# Altium PCB Copy of MB1180.PcbDoc
Units mm, origin at the board's own origin, x right, y up, seen from the top; angles counter-clockwise.
Board outline 90.32 x 30.2 mm, 4 copper layers (Top Layer, GND, PWR, Bottom Layer); 78 components, 56 nets, 240 pads, 83 vias.
Unrouted connection lines stored in the file: 1.
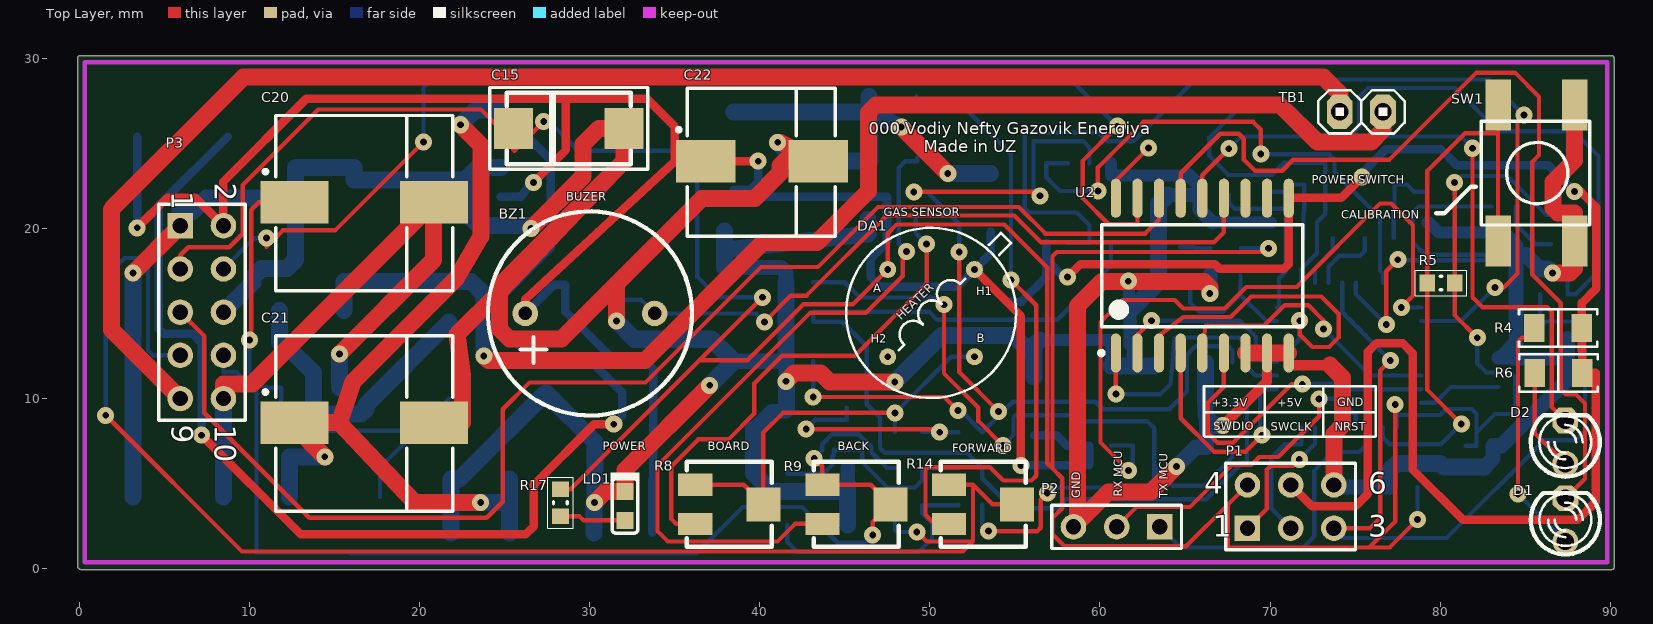
[diagram p0: Top Layer view]
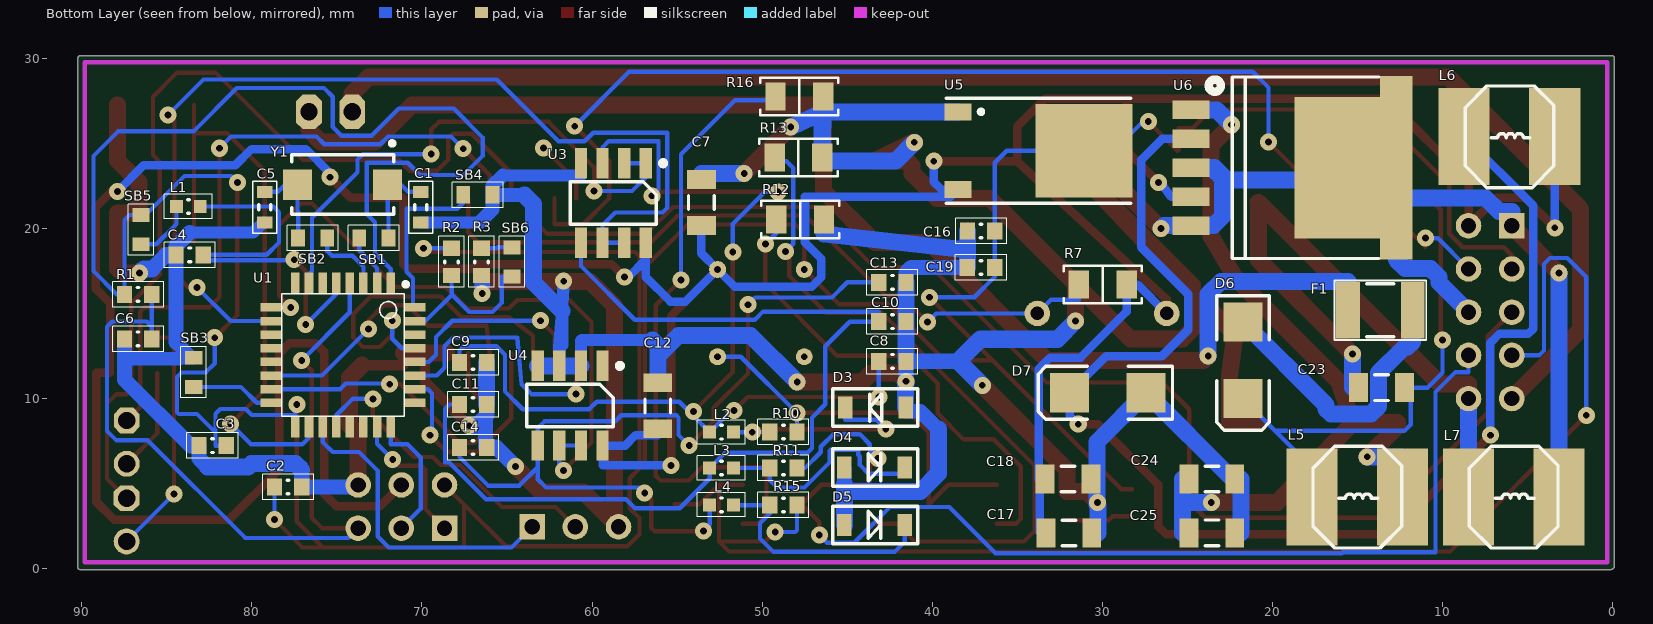
[diagram p1: Bottom Layer view, seen from below]

## Layer stack, top to bottom
Top Solder: solder mask 0.0102, Solder Resist, Dk 3.5
Top Layer: signal copper 0.0356
Dielectric1: core 0.32, FR-4, Dk 4.8
GND: signal copper 0.0356
Dielectric2: prepreg 0.32, FR-4, Dk 4.8
PWR: signal copper 0.0356
Dielectric3: core 0.32, FR-4, Dk 4.8
Bottom Layer: signal copper 0.0356
Bottom Solder: solder mask 0.0102, Solder Resist, Dk 3.5

## Board outline
-0.085,0.12 ccw(c0.042,0.12) 0,0 ccw(c0.103,0.074) 0.103,-0.053 90.103,-0.053 ccw(c90.103,0.074) 90.231,0.074 ccw(c90.103,0.074) 90.213,0.14 90.213,30.021 ccw(c90.085,30.021) 90.085,30.148 0.042,30.148 ccw(c0.042,30.021) -0.085,30.021

## Design rules (kind name [scope] priority, off if disabled: settings)
Clearance Clearance_ALL [All] p1: gap=0.254
DiffPairsRouting [All] p1: maxlimit=0.254 minlimit=0.152 mostfreqgap=0.254 toplayer_prefgap=0.203 toplayer_minwidth=0.381 toplayer_maxwidth=0.381 toplayer_prefwidth=0.381 midlayer1_mingap=0.254 midlayer1_minwidth=0.381 midlayer1_maxwidth=0.381 midlayer1_prefwidth=0.381 midlayer2_mingap=0.254 midlayer2_minwidth=0.381 midlayer2_maxwidth=0.381 midlayer2_prefwidth=0.381 bottomlayer_prefgap=0.203 bottomlayer_minwidth=0.381 bottomlayer_maxwidth=0.381 bottomlayer_prefwidth=0.381 maxuncoupledlength=12.7
FabricationTestPointUsage TestPointUsage [All] p1: valid=0 allowmultiple=FALSE
FabricationTestpoint Testpoint [(IsPad And (OnTopLayer Or OnBottomLayer))] p1: side=3 testpointundercomponent=TRUE minsize=1.016 maxsize=2.54 preferedsize=1.524 minholesize=0 maxholesize=1.016 preferedholesize=0.813 testpointgrid=0.025 allowsidetop=TRUE allowsidebottom=TRUE usegrid=TRUE gridtolerance=0
HoleSize [All] p1: absolutevalues=TRUE maxlimit=3 minlimit=0.025 maxpercent=80.000 minpercent=20.000
MinimumSolderMaskSliver [All] p1: minsoldermaskwidth=0
PolygonConnect PolygonConnect_1 [IsVia] p1: connectstyle=Direct reliefconductorwidth=0.508 reliefentries=4 polygonreliefangle="90 Angle" airgapwidth=0.254
PolygonConnect [All] p2: connectstyle=Relief reliefconductorwidth=0.254 reliefentries=4 polygonreliefangle="90 Angle" airgapwidth=0.254
RoutingLayers [All] p1: top layer_v5=TRUE mid layer 1_v5=FALSE mid layer 2_v5=FALSE bottom layer_v5=TRUE
RoutingVias [All] p1: holewidth=0.4 width=1 viastyle="Through Hole" minholewidth=0.203 minwidth=0.406 maxholewidth=0.711 maxwidth=2
SMDEntry [All] p1: side=TRUE corner=TRUE anyangle=FALSE
SMDNeckDown [All] p1: percent=100.000
SMDToCorner [All] p1: distance=393701
SMDToPlane [All] p1: distance=393701
SilkToSilkClearance [All] p1: silktosilkclearance=0.102
SilkToSolderMaskClearance SilkscreenOverComponentPads [IsPad] p1: minsilkscreentomaskgap=0.102 clearancetoexposedcopper=TRUE
SolderMaskExpansion [All] p1: expansion=0.102
Width "Schematic Width Constraint_9" [InNet('5V')] p1: maxlimit=1 minlimit=0.45 preferedwidth=0.5
Width "Schematic Width Constraint_8" [InNet('NetD7_2')] p2: maxlimit=1 minlimit=0.45 preferedwidth=0.5
Width "Schematic Width Constraint_7" [InNet('NetD6_1')] p3: maxlimit=1.1 minlimit=0.95 preferedwidth=1
Width "Schematic Width Constraint_5" [InNet('NetC21_1')] p4: maxlimit=1.1 minlimit=0.95 preferedwidth=1
Width "Schematic Width Constraint_4" [InNet('NetC20_2')] p5: maxlimit=1.1 minlimit=0.95 preferedwidth=1
Width "Schematic Width Constraint_3" [InNet('NetP3_9')] p6: maxlimit=1.1 minlimit=0.95 preferedwidth=1
Width "Schematic Width Constraint_2" [InNet('GND')] p7: maxlimit=1.1 minlimit=0.95 preferedwidth=1
Width "Schematic Width Constraint_1" [InNet('GND')] p8: maxlimit=1.1 minlimit=0.95 preferedwidth=1
Width "Schematic Width Constraint" [InNet('5V')] p9: maxlimit=1.1 minlimit=0.95 preferedwidth=1
Width "Schematic Width Constraint_6" [InNet('NetF1_1')] p10: maxlimit=1.1 minlimit=0.95 preferedwidth=1
Width Width_ALL [All] p11: maxlimit=0.3 minlimit=0.254 preferedwidth=0.254
22 further rules are at their usual default settings.

## Classes and differential pairs
component class MCU_32_1: C7 C8 C9 C10 C11 C12 C13 C14 C15 C16 C17 C18 C19 C20 C21 C22 C23 C24 C25 D3 D4 D5 D6 D7 DA1 F1 L2 L3 L4 L5 L6 L7 LD1 R8 R9 R10 R11 R12 R13 R14 R15 R16 R17 TB1 U3 U4 U5 U6
component class "Copy of MCU_32": BZ1 C1 C2 C3 C4 C5 C6 D1 D2 L1 P1 P2 P3 R1 R2 R3 R4 R5 R6 R7 SB1 SB2 SB3 SB4 SB5 SB6 SW1 U1 U2 Y1

## Components (designator, comment, footprint, x,y, rotation, side; value= is the part's Value field where it differs from the comment)
BZ1 "HCM-1203A" HCM-1203A 30.025,15 r90 top
C1 "22pF 6v" CAP0603 70.065,21.243 r270 bottom
C2 "100nF 6v" 0603C 77.866,4.795 r180 bottom
C3 "100nF 6v" 0603C 82.306,7.225 r0 bottom
C4 "100nF 6v" 0603C 83.648,18.446 r0 bottom
C5 "22pF 6v" CAP0603 79.235,21.243 r270 bottom
C6 "100nF 6v" 0603C 86.681,13.507 r180 bottom
C7 "1uF 16V" C1206 53.577,21.518 r90 bottom
C8 "1uF 16v" 0603C 42.344,12.186 r180 bottom
C9 "100nF 16v" 0603C 66.995,12.123 r180 bottom
C10 "1uF 16v" 0603C 42.344,14.512 r180 bottom
C11 "100nF 16v" 0603C 66.995,9.646 r180 bottom
C12 "1uF 16V" C1206 56.136,9.57 r90 bottom
C13 "1uF 16v" 0603C 42.344,16.83 r180 bottom
C14 "100nF 16v" 0603C 66.995,7.127 r180 bottom
C15 "220uF 10v" "SMD D" 26.224,25.876 r0 top
C16 "100nF 6v" 0603C 37.13,19.842 r180 bottom
C17 "0.1uF 16v" C1206 31.974,2.103 r180 bottom
C18 "1uF 16V" C1206 32.025,5.263 r180 bottom
C19 "1uF 6v" 0603C 37.137,17.695 r0 bottom
C20 "470uF 25v" C_EL_10 16.749,21.432 r0 top
C21 "470uF 25v" C_EL_10 16.749,8.478 r0 top
C22 "470uF 16v" C_EL_8 40.142,23.896 r0 top
C23 "0.1uF 25V" C1206 13.602,10.634 r0 bottom
C24 "0.1uF 25V" C1206 23.567,5.263 r180 bottom
C25 "1uF 25V" C1206 23.567,2.106 r180 bottom
D1 "LED GREEN" "My Green Led" 86.567,2.129 r90 top
D2 "LED RED" My_LED3MM 87.349,7.433 r90 top
D3 "BZT52C3V6" SOD-123 41.563,9.465 r0 bottom
D4 "BZT52C3V6" SOD-123 45.163,5.948 r180 bottom
D5 "BZT52C3V6" SOD-123 45.163,2.57 r180 bottom
D6 "SS34" SMB 21.739,12.245 r270 bottom
D7 "SS34" SMB 29.68,10.336 r0 bottom
DA1 "Gas sensor MQ4" MQ1 50.074,15.031 r0 top
F1 "Fuse 2" 1812 13.664,15.183 r180 bottom
L1 "100uH 20mA" 0603L 83.725,21.279 r180 bottom
L2 "100uH 20mA" 0603L 52.385,8.021 r180 bottom
L3 "100uH 20mA" 0603L 52.385,5.912 r180 bottom
L4 "100uH 20mA" 0603L 52.385,3.753 r180 bottom
L5 "100uH 2A" NR60 15.01,4.134 r180 bottom
L6 "33uH 2A" NR60 6.069,25.318 r180 bottom
L7 "100uH 2A" NR60 5.815,4.134 r180 bottom
LD1 "GREEN" 0603D_R 32.081,3.688 r270 top
P1 "PROGRAMER" HDR2X3_CEN 68.669,2.38 r0 top
P2 "Header 3" HDR1X3 63.522,2.455 r180 top
P3 "Header 5X2" HDR2X5 5.942,20.154 r270 top
R1 "10K" 0603R 86.681,16.125 r180 bottom
R2 "50K" 0603R 68.263,18.025 r90 bottom
R3 "1K" 0603R 66.488,18.025 r270 bottom
R4 "1k" "RES 1206/3216" 86.929,14.142 r0 top
R5 "10K" 0603R 80.044,16.785 r180 top
R6 "1k" "RES 1206/3216" 86.948,11.5 r0 top
R7 "1k" "RES 1206/3216" 29.982,16.69 r0 bottom
R8 "20k" POT4MM-2 38.212,3.779 r0 top
R9 "20k" POT4MM-2 45.679,3.779 r0 top
R10 "10K" 0603R 48.754,8.031 r180 bottom
R11 "10K" 0603R 48.754,5.912 r180 bottom
R12 "1k" "RES 1206/3216" 47.767,20.517 r180 bottom
R13 "1k" "RES 1206/3216" 47.869,24.169 r180 bottom
R14 "20k" POT4MM-2 53.137,3.779 r0 top
R15 "10K" 0603R 48.754,3.739 r180 bottom
R16 "1k" "RES 1206/3216" 47.818,27.756 r180 bottom
R17 "1K" 0603R 28.28,3.872 r90 top
SB1 "Circuit Breaker" SB_0603 72.82,19.435 r180 bottom
SB2 "Circuit Breaker" SB_0603 76.419,19.435 r0 bottom
SB3 "Circuit Breaker" SB_0603 83.413,11.537 r270 bottom
SB4 "Circuit Breaker" SB_0603 66.708,21.969 r0 bottom
SB5 "Circuit Breaker" SB_0603 86.504,19.926 r270 bottom
SB6 "Circuit Breaker" SB_0603 64.704,18.025 r270 bottom
SW1 "Button" SMD_SWITCH 83.398,19.247 r90 top
TB1 "PWR 12V" "terminal block2p" 75.618,27.101 r180 top
U1 "STM32F030K6T6" LQFP32_0R5_7X7 74.635,12.549 r0 bottom
U2 "ULN2804" SOL-18_N 66.014,17.223 r90 top
U3 "LM358AD" SO-8 58.746,21.493 r270 bottom
U4 "LM358AD" SO-8 61.286,9.581 r270 bottom
U5 "AMS1117-3.3" 369A-13 34.789,24.567 r270 bottom
U6 "DC/DC reg LM2596S" TO-263 12.728,23.562 r0 bottom
Y1 "XTAL" 3SMXA 74.66,22.572 r0 bottom

## Footprints (in the part's own frame and the unit in brackets; to place one, negate y for a bottom-side part, rotate by r counter-clockwise, add the part's x,y. Pads: shape width x height; smd on the part's side, far side on the other; paste and mask are expansions set on the pad)
3SMXA [mm] "Quartz Crystal, SM; Body 6.2 x 3.7 mm (LxW max)"
  rect 1.7x1.8 smd: 1(-2.65,0) 2(2.65,0)
  silkscreen extent -3.04,-2.55 3,1.75, body extent -2.7,-1.4 2.7,1.4, height 1.3
369A-13 [mm] "D-PAK/TO-252-AA; 3 Leads (1 Cropped); Body 10.3 (inc. leads) x 6.7 mm (LxW max)"
  rect 1x1.6 smd: 1(-2.285,-3.7) 3(2.285,-3.7)
  rect 5.5x5.7 smd: 4(0,3.7)
  silkscreen extent -3.09,-4.4 3.09,6.45, body extent -3.27,-3.91 3.27,6.03, height 2.34
0603C [mm] "Chip Capacitor, Body 1.6x0.8mm, Height 1.0mm, IPC Medium Density"
  rect 0.9x1 smd: 1(-0.8,0) 2(0.8,0)
  silkscreen extent -1.5,-0.75 1.5,0.75, body extent -0.87,-0.48 0.88,0.47, height 1
0603D_R [mm] "LED, SMT, Body 1.6 x 0.8 mm, 0.25mm Thickness"
  rect 1x1 smd paste+0 mask+0: 1(0.85,0) 2(-0.85,0)
  silkscreen extent -1.97,-0.84 1.6,0.86, body extent -0.8,-0.4 0.8,0.4, height 0.25
0603L [mil] "Bead 0603L"
  rect 30x30 smd: 1(27.5,0) 2(-27.5,0)
  silkscreen extent -56,-28 55,28, body extent -34,-19 34,19, height 24
0603R [mm] "Chip Resistor, Body 1.6x0.8mm, IPC Medium Density"
  rect 0.9x1 smd: 1(-0.8,0) 2(0.8,0)
  silkscreen extent -1.5,-0.75 1.5,0.75, body extent -0.85,-0.47 0.85,0.47, height 0.6
1812 [mm] "Chip Capacitor, Body 4.5x3.2mm, IPC High Density"
  rect 1.4x3.3 smd: 1(-1.9,0) 2(1.9,0)
  silkscreen extent -2.7,-1.75 2.7,1.75, body extent -2.36,-1.74 2.37,1.74, height 1.03
C1206 [mm] "Chip Capacitor, Body 3.2x1.6mm, IPC High Density"
  rect 1.1x1.7 smd: 1(-1.35,0) 2(1.35,0)
  silkscreen extent -0.4,-0.75 0.4,0.75, body extent -1.7,-0.9 1.7,0.9, height 1.3
C_EL_8 [mm]
  rect 3.5x2.5 smd: 1(-3.3,0.05) 2(3.3,0.05)
  silkscreen extent -5,-4.35 4.3,4.35, body extent -4.5,-4.15 4.5,4.15, height 6.9
C_EL_10 [mm]
  rect 4x2.5 smd: 1(-4.1,0.1) 2(4.1,0.1)
  silkscreen extent -5.9,-5.1 5.2,5.2, body extent -5.5,-5.15 5.5,5.15, height 12.6
CAP0603 [mm] "Chip Capacitor, 2-Leads, Body 1.6x0.8mm, IPC Medium Density"
  rect 0.7x0.9 smd: 1(-0.9,0) 2(0.9,0)
  silkscreen extent -1.53,-0.7 1.52,0.7, body extent -0.8,-0.4 0.8,0.4, height 0.3
HCM-1203A [mm] "Buzzer"
  round 1.5 hole 0.8: 1(0,3.8) 2(0,-3.8)
  silkscreen extent -6,-6 6,6, body extent -6,-6 6,6, height 9.5
HDR1X3 [mm] "Connector; Header; 3 Position"
  rect 1.5x1.5 hole 0.9: 1(0,0)
  round 1.5 hole 0.9: 2(2.54,0) 3(5.08,0)
  silkscreen extent -1.27,-1.27 6.35,1.27, body extent -1.27,-1.46 6.35,1.46, height 8.51
HDR2X3_CEN [mm] "Connector; Header; 3x2 Position"
  rect 1.5x1.5 hole 0.9: 1(0,0)
  round 1.5 hole 0.9: 2(2.54,0) 3(5.08,0) 4(0,2.54) 5(2.54,2.54) 6(5.08,2.54)
  silkscreen extent -1.27,-1.27 6.35,3.81, body extent -1.27,-1.27 6.35,3.77, height 8.5
HDR2X5 [mm] "Connector; Header; 5x2 Position"
  rect 1.5x1.5 hole 0.9: 1(0,0)
  round 1.5 hole 0.9: 2(0,2.54) 3(2.54,0) 4(2.54,2.54) 5(5.08,0) 6(5.08,2.54) 7(7.62,0) 8(7.62,2.54) 9(10.16,0) 10(10.16,2.54)
  silkscreen extent -1.27,-1.27 11.43,3.81, body extent -5.1,-10.62 15.25,2.88, height 9.02
LQFP32_0R5_7X7 [mm] "LQFP32 Recommended ,32 Pin MCU Size,7x7mm, Pitch, 0.8mm"
  rect 0.5x1.2 smd: 1(-2.8,-4.25) 2(-2,-4.25) 3(-1.2,-4.25) 4(-0.4,-4.25) 5(0.4,-4.25) 6(1.2,-4.25) 7(2,-4.25) 8(2.8,-4.25) 17(2.8,4.25) 18(2,4.25) 19(1.2,4.25) 20(0.4,4.25) 21(-0.4,4.25) 22(-1.2,4.25) 23(-2,4.25) 24(-2.8,4.25)
  rect 1.2x0.5 smd: 9(4.25,-2.8) 10(4.25,-2) 11(4.25,-1.2) 12(4.25,-0.4) 13(4.25,0.4) 14(4.25,1.2) 15(4.25,2) 16(4.25,2.8) 25(-4.25,2.8) 26(-4.25,2) 27(-4.25,1.2) 28(-4.25,0.4) 29(-4.25,-0.4) 30(-4.25,-1.2) 31(-4.25,-2) 32(-4.25,-2.8)
  silkscreen extent -3.81,-4.29 3.6,3.6, body extent -4.55,-4.55 4.6,4.6, height 1.62
MQ1 [mm]
  round 1 hole 0.4: A(-2.55,2.55) B(2.55,-2.575) H1(2.55,2.55) H2(-2.55,-2.575)
  silkscreen extent -5,-5 5,5, body extent -4.4,-4.5 4.6,4.5, height 8
"My Green Led" [mil]
  round 60 hole 40: A(-21,-31)
  oct 60x60 hole 40: K(79,-31)
  silkscreen extent -51,-111 91,49, body extent -49,-90 107,48, height 212
My_LED3MM [mil]
  round 60 hole 40: A(-50,0)
  oct 60x60 hole 40: K(50,0)
  silkscreen extent -80,-80 62,80, body extent -66,-65 61,65, height 196
NR60 [mm] "TAIYO INDUCTOR"
  rect 3x5.7 smd: 1(-2.671,0.079) 2(2.654,0.079)
  silkscreen extent -2.62,-2.92 2.59,3.05, body extent -2.5,-2.4 2.5,2.6, height 2.85
POT4MM-2 [mm] "Square Trimming Potentiometer"
  rect 2x1.3 smd: CCW(-2,-1.15) CW(-2,1.15)
  rect 2x2 smd: W(2,0)
  silkscreen extent -2.5,-2.5 2.5,2.5, body extent -2.5,-2.49 2.5,2.51, height 2.67
"RES 1206/3216" [mm] "Chip Resistor, 2-Leads, Body 3.13x1.55mm, IPC Medium Density"
  rect 1.2x1.65 smd: 1(-1.4,0) 2(1.4,0)
  silkscreen extent -2.3,-1.1 2.3,1.1, body extent -1.58,-0.8 1.62,0.8, height 0.6
SB_0603 [mil] "Jumper"
  rect 32x40 smd: 1(33.75,0) 2(-33.75,0)
  silkscreen extent -59,-30 59,30, body extent -30,-15 32,16, height 18
SMB [mm] "DO-214-AA/SMB; 2 C-Bend Leads; Body 5.3 x 3.6 mm, inc. leads (LxW)"
  rect 2.3x2.3 smd: 1(-2.25,0) 2(2.25,0)
  silkscreen extent -3.8,-1.55 4.1,1.55, body extent -2.6,-1.8 2.6,1.8, height 2.4
"SMD D" [mm] "SMD D Tantalum electrolytic capacitor"
  rect 2.286x2.4 smd: 1(-0.7,0) 2(5.8,0)
  silkscreen extent -2.1,-2.4 7.2,2.4, body extent -1.25,-2.3 6.35,2.3, height 3.1
SMD_SWITCH [mm]
  rect 3x1.5 smd: 1(0,0) 2(8,0) 3(0,-4.5) 4(8,-4.5)
  silkscreen extent 0.95,-5.4 7.05,1, body extent -1,-5.2 9,0.8, height 4.97
SO-8 [mm]
  rect 1.78x0.72 smd: 1(-2.336,1.905) 2(-2.336,0.635) 3(-2.336,-0.635) 4(-2.336,-1.905) 5(2.344,-1.905) 6(2.344,-0.635) 7(2.344,0.635) 8(2.344,1.905)
  silkscreen extent -2.49,-2.54 1.25,3.07, body extent -2.99,-2.44 3.01,2.46, height 1.7
SOD-123 [mm] "SOD-123 diode package"
  rect 0.85x1.3 smd: 1(0,0) 2(3.55,0)
  silkscreen extent -0.7,-1.1 4.3,1.1, body extent -0.18,-0.9 3.72,0.9, height 1.18
SOL-18_N [mm] "18-Pin Small Outline Integrated Circuit 1.27 mm Pitch, IPC Medium Density"
  oval 2.3x0.6 smd: 1(-4.55,5.08) 2(-4.55,3.81) 3(-4.55,2.54) 4(-4.55,1.27) 5(-4.55,0) 6(-4.55,-1.27) 7(-4.55,-2.54) 8(-4.55,-3.81) 9(-4.55,-5.08) 10(4.55,-5.08) 11(4.55,-3.81) 12(4.55,-2.54) 13(4.55,-1.27) 14(4.55,0) 15(4.55,1.27) 16(4.55,2.54) 17(4.55,3.81) 18(4.55,5.08)
  silkscreen extent -4.67,-5.9 3,6.05, body extent -5.3,-5.87 5.3,5.88, height 2.62
"terminal block2p" [mil]
  oct 60x80 hole 40: 1(-40,10) 2(60,10)
  silkscreen extent -90,-40 110,60, body extent -99,-120 119,136, height 341
TO-263 [mm]
  rect 2.16x1.07 smd: 1(12.065,-3.404) 2(12.065,-1.702) 3(12.065,0) 4(12.065,1.702) 5(12.065,3.404)
  rect 1.91x10.8 smd: 3(0,0)
  rect 5.08x8.33 smd: 3(3.429,0)
  silkscreen extent 1.02,-5.33 11.03,5.33, body extent -0.9,-5.06 13.11,5.1, height 4.56

## Part data
BZ1: "HCM-1203A buzzer"
C1 C5: library part Capacitor_np
C2: library part Cap, "Capacitor 100nF 5v"
C3 C4: library part Cap, "Capacitor"
C6 C9 C11 C14: library part CAP, "Capacitor"
C7 C12 C18: library part C, "Capacitor 1uF 16V"
C8 C10 C13 C19: library part "CAP SMD 0603  X5R 1µF 25V 10%", "0603  X5R 1µF"
C15 C20 C21 C22: library part CP, "Capacitor polarized"
C16: library part Capacitor_ST, "Capacitor 0402 / 0603 / 0805"
C17: library part C, "Capacitor 0.1uF 12V"
C23 C24: library part C, "Capacitor 0.1uF 25V"
C25: library part C, "Capacitor 1uF 25V"
D1 D2: library part LED3m, "Typical INFRARED GaAs LED"
D3 D4 D5: "Surface Mount Zener Diode"
D6 D7: library part "D Schottky", "Schottky Diode 40V 3A"
DA1: library part MQ1
F1: "Fuse"
L1 L2 L3 L4: library part Inductor, "Inductor"
L5 L7: library part L, "Inductor 100uH 2A"
L6: library part L, "Inductor 33uH 2A"
LD1: library part PHOTO
P1: library part "Header 3X2A", "Header, 3-Pin, Dual row"
P2: "Header, 3-Pin"
P3: "Header, 5-Pin, Dual row"
R1 R2 R5 R10 R11 R15: library part Res1, "Resistor"
R3: library part res1, "Resistor"
R4 R6 R7 R12 R13 R16: library part Resistor1, "Resistor"
R8 R9 R14: library part "RPot SM", "Square Trimming Potentiometer"
R17: library part Resistor_ST, "Resistor 0402 / 0603 / 0805"
SW1: library part SMD_SWITCH
TB1: library part "Terminal block 2p", "Terminal block 2p 2.54mm"
U1: library part MCU_LQFP32
U2: library part ULN2803, "HIGH-VOLTAGE,HIGH-CURRENT DARLINTON ARRAYS"
U3 U4: "Dual Operational Amplifier"
U5: library part LT1117CM-5, "1 A Low Dropout Positive Regulator, 2.45 to 15 V Vin, 5 V Vout, 3-pin DPAK (M-3), 0 to 125 degC"
U6: library part "TI LM2596"
Y1: "Crystal Oscillator 0.197\" L x 0.126\" W (5.00mm x 3.20mm)"

## Via types
v1: diameter 1, hole 0.4, Top Layer to Bottom Layer, 83 vias

## Nets (pads, with @x,y where several pads share a name; then routed paths per layer and width w, separated by ;. In a path a pad name is that pad's centre, name@x,y a point inside that pad or via, vN(x,y) a via of type N, cw(c..) or ccw(c..) an arc to the next point about the centre after c; other vN are vias at no path point)
5V: BZ1.1 C7.1 C12.1 C17.1 C18.1 C22.1 DA1.H1 L6.2 P1.5 P3.2 R4.2 R6.2 R7.1 U2.10 U3.8 U4.8 U5.3 U6.4 | length 242.2
  Top Layer w0.5: v1(3.415,20.031) 5.197,21.813 6.824,21.813 P3.2 8.482,22.752 13.35,27.62 28.611,27.62 ; BZ1.1 26.225,15.822 35.012,23.946 ; v1(26.706,22.702) 28.611,24.607 28.611,27.62 ; v1(39.914,23.946) C22.1 35.012,23.946 ; DA1.H1 55.357,14.848 v1(55.357,6.065) ; v1(58.1,17.139) 58.862,17.901 66.748,17.901 67.038,17.611 70.804,17.611 71.094,17.901 U2.10 71.094,21.787 74.178,21.787 v1(75.397,23.007) ; P1.5 72.463,3.666 75.016,3.666 75.753,4.403 75.753,12.745 76.261,13.253 77.785,13.253 78.377,12.661 78.377,5.836 81.349,2.864 88.072,2.864 89.139,3.931 89.139,11.5 R6.2 88.348,12.796 88.329,12.815 R4.2 88.329,15.615 89.164,16.45 89.164,21.254 88.25,22.168 v1(87.894,22.168) ; 28.611,27.62 33.37,27.62 35.012,25.978 35.012,23.946
  Bottom Layer w0.5: v1(3.415,20.031) L6.2 ; U6.4 25.969,21.861 26.601,22.702 v1(26.706,22.702) ; BZ1.1 27.915,16.69 R7.1 28.582,15.107 31.283,12.407 33.081,12.407 33.75,11.738 33.75,5.263 33.699,5.263 C17.1@33.699,2.103 ; v1(39.914,23.946) 39.914,22.727 39.468,22.282 U5.3 38.907,21.864 47.483,21.864 47.483,19.171 46.518,18.206 46.518,17.139 47.08,16.577 51.62,16.577 DA1.H1 ; C7.1@53.577,19.793 53.577,18.535 DA1.H1 ; v1(55.357,6.065) 59.381,6.065 U4.8 58.048,7.237 57.44,7.845 C12.1@56.136,7.845 ; U3.8 56.841,18.155 ; v1(58.1,17.139) 57.857,17.139 56.841,18.155 ; v1(75.397,23.007) 75.397,23.235 76.82,24.658 80.013,24.658 80.966,23.704 86.358,23.704 v1(87.894,22.168) ; DA1.H1 54.513,15.691 55.393,15.691 56.841,17.139 56.841,18.155
AVDD: C4.1 L1.1 U1.5 | length 24.3
  Top Layer w0.254: v1(76.828,14.345) 76.828,17.477 v1(77.506,18.155)
  Bottom Layer w0.254: U1.5 75.035,16.138 v1(76.828,14.345) ; v1(77.506,18.155) 77.531,18.13 82.848,18.13 C4.1 79.12,18.446 78.395,19.171 78.395,20.949 78.725,21.279 L1.1
BOOT0: R3.1 SB6.2 | length 1.8
  Bottom Layer w0.254: SB6.2 65.542,18.883 65.6,18.825 R3.1
GND: C1.2 C2.2 C3.2 C4.2 C5.2 C6.1 C7.2 C8.2 C9.2 C10.2 C11.2 C12.2 C13.2 C14.2 C15.2 C16.1 C17.2 C18.2 C19.2 C21.2 C22.2 C24.2 C25.2 D3.1 D4.1 D5.1 D7.1 L7.2 LD1.2 P1.6 P2.3 P3.1 P3.6 R3.2 R12.2 R13.2 R16.2 SB3.2 SB4.2 SW1.3 SW1.4 U2.7 U2.8 U2.9 U3.4 U4.2 U4.3 U4.4 U5.1 U6.3 U6.5 | length 403.9
  Top Layer w0.6: v1(67.219,8.402) 69.824,11.007 U2.8 ; U2.9 71.094,11.958 73.516,11.958
  Top Layer w1: v1(3.161,17.373) P3.1 ; C21.2 22.54,8.578 22.54,11.353 22.213,13.774 24.699,16.26 ; v1(26.55,19.984) 29.628,23.062 29.628,24.963 30.541,25.876 C15.2 32.024,23.956 ; v1(30.287,3.88) 30.944,4.538 LD1.2 32.081,5.793 v1(37.063,10.776) ; v1(31.582,14.548) 31.582,16.733 ; v1(41.057,25.06) 41.184,25.06 C22.2 41.463,23.946 41.184,23.666 41.184,23.235 39.71,21.762 36.612,21.762 31.582,16.733 ; v1(41.544,11.009) 42.045,11.51 43.57,11.51 44.113,10.967 v1(47.94,10.967) ; v1(48.321,25.953) v1(51.056,23.218) ; P2.3 P2.3@58.668,2.681 ; v1(61.668,16.895) v1@61.668,16.873 ; v1(64.491,6.005) 62.993,4.506 60.493,4.506 P2.3@58.668,2.681 ; v1(66.457,16.174) 66.457,16.517 66.101,16.873 v1@61.668,16.873 ; U2.7 U2.8 U2.9 ; 73.516,11.958 74.253,11.221 74.253,8.426 73.749,7.922 P1.6 ; v1(86.599,17.368) 87.619,17.368 87.898,17.647 SW1.3 87.898,20.914 86.929,20.914 86.64,21.203 86.64,22.727 87.898,23.986 SW1.4 ; 24.699,16.26 32.024,23.956 ; 24.699,16.26 24.699,14.091 25.294,13.496 28.345,13.496 31.582,16.733 ; 24.699,16.26 24.699,16.631 32.024,23.956 ; P2.3@58.668,2.681 58.668,15.435 60.106,16.873 v1@61.668,16.873
  Bottom Layer w0.7: 66.609,20.343 C1.2 ; C5.2 79.334,20.343 79.922,19.755 83.652,19.755
  Bottom Layer w0.72: 56.449,13.441 60.604,13.441 60.651,13.395 U4.2 ; U3.4 60.651,23.109 65.249,23.109 ; v1(61.668,16.895) 61.758,15.145 ; U4.3 61.921,12.974 ; 61.758,15.145 61.921,12.974 ; 61.758,15.145 61.758,13.137 61.921,12.974
  Bottom Layer w0.813: 63.983,21.969 SB4.2 ; 65.249,23.109 65.851,22.507 SB4.2 ; 66.609,20.343 65.851,21.101 SB4.2 ; SB3.2 SB3.2@83.533,12.395 ; 84.448,13.309 SB3.2@83.533,12.395 ; 87.208,12.339 84.262,12.339 84.206,12.395 SB3.2@83.533,12.395
  Bottom Layer w0.85: 39.65,8.2 40.701,9.251 41.563,9.251 D3.1 ; 44.765,4.541 45.163,4.939 D4.1
  Bottom Layer w0.9: C19.2 41.242,17.695 41.544,17.393 C13.2 ; 38.474,12.186 C8.2 v1(41.544,11.009) ; v1(64.491,6.005) 65.614,7.127 C14.2 66.265,7.127 66.265,8.939 66.195,9.009 66.195,9.011 ; C11.2 66.195,9.011 ; v1(66.457,16.174) 66.457,17.225 R3.2 ; v1@66.805,8.402 66.195,9.011 ; P1.6@73.875,4.795 C2.2 77.066,5.811 ; 82.598,5.963 83.106,6.471 C3.2 83.605,7.225 87.481,11.101 87.481,12.611 ; 83.652,19.755 84.448,18.96 C4.2 ; 84.448,13.309 C4.2 ; 85.874,17.622 85.049,18.446 C4.2 ; 87.208,12.339 87.481,12.611 ; C6.1 87.481,12.611
  Bottom Layer w1: L7.2 v1(3.161,17.373) ; P3.1 5.942,21.004 6.696,21.004 7.485,21.793 U6.3@12.728,21.793 ; P3.6 10.221,16.813 10.221,17.139 10.729,17.647 12.22,17.647 12.728,18.155 U6.3@12.728,21.793 ; C25.2@21.867,2.106 21.867,5.263 22.357,5.263 27.43,10.336 30.325,7.442 30.325,5.263 v1@30.325,3.918 ; U6.3@24.793,23.562 23.579,23.562 ; v1(26.55,19.984) 26.375,20.159 U6.5 23.483,20.159 22.946,20.695 22.946,22.93 23.579,23.562 ; C17.2@30.274,2.103 30.274,3.703 30.325,3.753 v1@30.325,3.918 ; v1(30.287,3.88) v1@30.325,3.918 ; v1(31.582,14.548) 32.649,13.482 37.178,13.482 38.474,12.186 v1(37.063,10.776) ; C16.1 37.93,19.679 C19.2 37.937,18.739 46.367,19.679 R12.2 ; U5.1 46.418,26.852 ; 39.65,8.2 39.65,5.592 40.701,4.541 44.765,4.541 ; v1(41.057,25.06) 42.17,23.946 46.469,23.946 R13.2 46.469,25.928 46.418,25.978 46.418,26.852 ; v1(41.544,11.009) 41.544,10.834 41.563,10.815 D3.1 ; C8.2 C10.2 C13.2 ; D5.1 45.163,4.939 ; R16.2 46.418,26.852 ; v1(47.94,10.967) 50.683,13.71 54.925,13.71 56.136,12.499 ; v1(48.321,25.953) 46.418,26.852 ; v1(51.056,23.218) C7.2@53.577,23.218 ; C12.2@56.136,11.27 56.136,12.499 ; 56.449,13.441 56.136,13.128 56.136,12.499 ; U4.2 U4.3 U4.4 ; 61.758,15.145 63.434,16.822 63.434,21.42 63.983,21.969 ; C11.2 C9.2 ; v1@66.805,8.402 v1(67.219,8.402) ; P1.6 P1.6@73.875,4.795 ; 77.066,5.811 77.422,6.166 80.02,6.166 80.223,5.963 82.598,5.963 ; 85.874,17.622 86.345,17.622 v1(86.599,17.368) ; U6.3@12.728,21.793 12.728,23.562 16.157,23.562 16.157,22.829 22.692,22.829 23.426,23.562 23.579,23.562
NetBZ1_2: BZ1.2 R7.2 U2.13 | length 42.8
  Top Layer w0.254: v1(40.274,14.492) 41.829,16.047 42.758,16.047 47.463,20.752 54.966,20.752 56.537,19.181 66.695,19.181 67.284,19.77 U2.13
  Bottom Layer w0.254: R7.2 31.382,15.8 33.026,15.8 BZ1.2 39.766,15 v1(40.274,14.492)
NetC1_1: C1.1 SB1.1 Y1.1 | length 5.3
  Bottom Layer w0.254: C1.1 70.8,22.143 71.229,22.572 Y1.1 72.01,21.022 71.963,20.975 SB1.1
NetC5_1: C5.1 SB2.1 Y1.2 | length 5.3
  Bottom Layer w0.254: SB2.1 77.276,20.975 77.31,21.009 Y1.2 78.039,22.572 78.468,22.143 C5.1
NetC6_2: C6.2 P1.3 R1.2 U1.4 | length 47.4
  Top Layer w0.254: P1.3 75.871,2.38 76.472,2.982 76.472,11.645 v1(77.064,12.237)
  Bottom Layer w0.254: P1.3 74.332,1.798 80.376,1.798 86.116,7.538 87.945,7.538 88.504,8.097 88.504,14.218 88.199,14.523 86.167,14.523 85.881,14.237 ; U1.4 74.235,15.066 v1(77.064,12.237) ; C6.2 85.881,14.237 ; R1.2 85.881,14.237
NetC8_1: C8.1 C9.1 L2.2 U3.3 | length 63.1
  Top Layer w0.254: v1(43.144,10.086) 50.853,10.086 v1(51.648,9.291) ; v1(49.058,22.143) 56.246,22.143 v1(56.474,21.914) ; v1(51.725,18.612) 51.725,11.551 v1(54.036,9.24)
  Bottom Layer w0.254: v1(43.144,10.086) C8.1 ; v1(49.058,22.143) 49.845,22.143 51.725,20.263 v1(51.725,18.612) ; v1(51.648,9.291) 51.814,9.291 L2.2 v1@54.036,8.973 ; v1(54.036,9.24) v1@54.036,8.973 ; v1(56.474,21.914) 56.093,22.295 56.093,25.115 59.025,25.115 59.381,24.759 U3.3 ; C9.1 67.795,12.821 67.541,13.075 65.618,13.075 65.11,12.567 65.11,10.408 64.069,9.367 60.171,9.367 59.726,9.812 54.875,9.812 v1@54.036,8.973
NetC10_1: C10.1 C11.1 L3.2 U3.5 | length 59.6
  Bottom Layer w0.254: U3.5 60.651,17.79 57.486,14.625 50.429,14.625 49.947,15.107 43.144,15.107 C10.1 44.852,14.512 46.289,13.075 46.289,9.658 47.076,8.871 47.076,7.081 47.356,6.801 52.195,6.801 L3.2 53.084,5.315 54.846,3.554 57.478,3.554 58.008,4.084 66.233,4.084 68.392,6.243 68.641,6.243 68.641,9.392 68.387,9.646 C11.1
NetC13_1: C13.1 C14.1 L4.2 U4.5 | length 51.5
  Top Layer w0.254: v1(50.836,15.514) 50.836,11.475 52.854,9.457 52.854,8.669 v1(54.29,7.233) ; v1(53.452,2.204) 56.322,2.204 56.525,2.407 56.525,4.058 v1(56.906,4.439)
  Bottom Layer w0.254: C13.1 45.005,16.83 45.896,15.938 50.411,15.938 v1(50.836,15.514) ; L4.2 53.084,2.572 v1(53.452,2.204) ; v1(54.29,7.233) 54.916,7.859 54.916,8.875 55.052,9.011 58.278,9.011 58.633,8.656 62.799,8.656 63.191,8.264 U4.5 63.191,5.963 ; v1(56.906,4.439) 57.23,4.763 62.697,4.763 63.191,5.257 63.191,5.963 ; C14.1 67.795,6.559 66.115,4.879 64.275,4.879 63.191,5.963
NetC20_1: C20.1 C23.1 D6.2 L5.1 | length 32.3
  Top Layer w0.254: v1(10.018,13.435) 10.121,13.539 10.121,21.089 10.564,21.532 C20.1
  Bottom Layer w0.254: v1(10.018,13.435) 10.018,11.508 10.892,10.634 11.877,10.634 11.877,8.473 12.253,8.097 19.841,8.097 ; L5.1 17.681,5.937 19.841,8.097 ; D6.2 19.841,8.097
NetC20_2: C20.2 C23.2 L7.1 P3.10 | length 36.6
  Top Layer w1: P3.10 8.482,10.84 10.146,10.84 C20.2@20.838,21.532 ; v1(15.302,12.617) 20.838,18.152 C20.2@20.838,21.532 ; C20.2 C20.2@20.838,21.532
  Bottom Layer w1: P3.10 8.482,7.085 8.486,7.081 L7.1 ; C23.2@15.302,10.634 v1(15.302,12.617)
NetC21_1: C21.1 C24.1 C25.1 L5.2 U6.1 | length 48.8
  Top Layer w1: v1(14.437,6.573) 12.649,8.362 C21.1 15.301,8.578 ; v1(22.413,26.089) 23.607,24.895 23.607,19.527 22.159,17.034 16.087,10.962 15.301,8.578 ; v1(23.602,3.88) 19.721,3.88 15.301,8.578
  Bottom Layer w1: L5.2 12.356,6.573 v1(14.437,6.573) ; v1(22.413,26.089) 23.29,26.966 U6.1 ; v1(23.602,3.88) 25.292,3.88 ; C25.1@25.292,2.106 25.292,3.88 ; C24.1@25.292,5.263 25.292,3.88
NetD1_A: D1.A R4.1 | length 14.5
  Top Layer w0.254: v1(84.567,4.383) 84.567,13.329 84.821,13.583 85.529,13.583 R4.1
  Bottom Layer w0.254: v1(84.567,4.383) D1.A
NetD1_K: D1.K U2.15 | length 54
  Top Layer w0.254: U2.15 64.744,23.235 67.073,25.564 68.158,25.564 68.455,25.267 68.455,24.04 69.107,23.388 70.711,23.388 71.364,24.041 77.016,24.041 82.128,29.153 84.389,29.153 85.803,27.739 85.803,24.304 85.405,23.905 85.405,17.292 87.081,15.615 87.081,10.535 87.361,10.256 87.945,10.256 88.504,9.697 88.504,5.286 D1.K
NetD2_A: D2.A R6.1 | length 6.1
  Top Layer w0.254: R6.1 85.548,7.964 D2.A
NetD2_K: D2.K U2.14 | length 39.3
  Top Layer w0.254: U2.14 66.014,23.123 v1(67.574,24.683) ; v1(81.9,24.708) 81.9,15.945 82.484,15.361 86.294,15.361 86.548,15.107 86.548,9.504 D2.K
  Bottom Layer w0.254: v1(67.574,24.683) 68.285,25.394 71.991,25.394 72.443,24.942 75.745,24.942 76.197,25.394 81.214,25.394 v1(81.9,24.708)
NetD3_2: D3.2 L2.1 R10.1 | length 13.4
  Top Layer w0.254: v1(42.733,8.198) 50.404,8.198 v1(50.582,8.021)
  Bottom Layer w0.254: v1(42.733,8.198) 43.292,8.757 45.113,8.757 D3.2 ; R10.1 50.215,8.031 50.226,8.021 v1(50.582,8.021) L2.1
NetD4_2: D4.2 L3.1 R11.1 | length 13.7
  Bottom Layer w0.254: D4.2 41.613,5.582 43.749,5.582 44.257,6.09 44.257,6.598 44.357,6.698 44.357,6.98 45.984,6.98 46.035,6.929 46.035,6.243 47.508,4.769 49.122,4.769 49.554,5.201 R11.1 L3.1
NetD5_2: D5.2 L4.1 R15.1 | length 14.4
  Bottom Layer w0.254: D5.2 41.613,1.597 42.225,0.985 49.337,0.985 50.124,1.772 50.124,2.666 49.554,3.236 R15.1@49.554,3.728 ; R15.1 R15.1@49.554,3.728 ; L4.1 51.687,3.728 R15.1@49.554,3.728
NetD6_1: D6.1 F1.2 | length 17.1
  Bottom Layer w1: F1.2 11.764,13.329 12.068,13.024 12.253,13.024 13.788,11.489 13.788,9.519 14.228,9.08 16.571,9.08 16.874,9.383 16.874,9.63 D6.1
NetD7_2: D7.2 L6.1 U6.2 | length 77.2
  Top Layer w0.5: v1(7.198,7.843) 13.015,2.026 26.262,2.026 26.731,2.495 26.731,4.947 30.275,8.491 v1(31.422,8.491)
  Bottom Layer w0.5: v1(7.198,7.843) 7.198,13.278 6.665,13.812 4.963,13.812 4.684,14.091 4.684,21.341 L6.1 ; U6.2 26.477,25.264 27.722,24.02 27.722,18.892 24.953,16.123 24.953,14.04 26.513,12.481 29.785,12.481 31.93,10.336 31.93,8.999 v1(31.422,8.491)
NetDA1_B: DA1.B R8.CW R8.W R10.2 | length 24.1
  Top Layer w0.254: R8.CW 39.062,4.929 R8.W 40.212,7.995 41.372,9.156 v1(47.954,9.156) ; DA1.B DA1.B@52.624,12.481
  Bottom Layer w0.254: R10.2 v1(47.954,9.156) 51.254,12.456 DA1.B
NetDA1_H2: DA1.H2 U2.18 | length 3.8
  Top Layer w0.254: U2.18 60.934,22.815 v1(62.85,24.731)
NetF1_1: F1.1 TB1.1 | length 78
  Top Layer w1: v1(23.785,12.505) 24.047,12.242 33.257,12.242 40.173,19.157 43.354,19.157 46.39,22.194 46.39,26.816 46.832,27.258 70.587,27.258 72.781,25.064 75.923,25.064 76.634,25.775 TB1.1
  Bottom Layer w1: F1.1 15.564,16.885 23.023,16.885 23.785,16.123 v1(23.785,12.505)
NetL1_2: L1.2 SB5.1 | length 3.6
  Bottom Layer w0.254: L1.2 84.424,20.253 85.608,19.068 SB5.1
NetLD1_1: LD1.1 R17.1 | length 3.9
  Top Layer w0.254: R17.1 29.408,3.072 29.642,2.838 LD1.1
NetP1_1: P1.1 U1.23 | length 8.3
  Top Layer w0.254: P1.1 69.809,3.52 69.809,5.823 70.038,6.051 71.345,6.051 v1(71.714,6.42)
  Bottom Layer w0.254: v1(71.714,6.42) 72.635,7.341 U1.23
NetP1_2: P1.2 U1.24 | length 7.7
  Bottom Layer w0.254: P1.2 70.063,3.526 70.063,6.527 70.841,7.305 71.835,7.305 U1.24
NetP2_1: P2.1 U1.19 | length 18.5
  Bottom Layer w0.254: P2.1 64.739,1.239 71.943,1.239 72.603,1.899 72.603,5.76 73.702,6.858 75.245,6.858 75.835,7.449 U1.19
NetP2_2: P2.2 U1.20 | length 18.9
  Top Layer w0.254: P2.2 62.152,3.625 65.295,3.625 67.761,6.09 68.895,6.09 69.364,6.559 70.482,6.559 72.883,8.96 v1(72.883,9.976)
  Bottom Layer w0.254: v1(72.883,9.976) 74.07,9.976 75.035,9.011 U1.20
NetP3_4: P3.4 U2.17 | length 71.7
  Top Layer w0.254: v1(11.008,19.425) 11.008,18.917 11.974,19.882 15.047,19.882 v1(20.237,25.072) ; v1(61.021,26.004) 58.997,23.98 58.997,21.754 60.513,20.238 62.204,20.238 U2.17
  Bottom Layer w0.254: P3.4 10.293,19.425 v1(11.008,19.425) ; v1(20.237,25.072) 20.237,28.272 21.168,29.204 57.821,29.204 v1(61.021,26.004)
NetP3_5: P3.5 U2.16 | length 78.2
  Top Layer w0.254: P3.5 7.351,13.666 7.351,9.164 13.523,2.991 23.962,2.991 24.902,3.931 24.902,9.367 26.477,10.942 33.288,10.942 40.08,17.734 43.426,17.734 46.952,21.26 55.223,21.26 56.793,19.689 62.653,19.689 63.474,20.51 U2.16
NetP3_7: P3.7 R14.CW R14.W R15.2 | length 87
  Top Layer w0.254: v1(1.56,9.011) 9.568,1.003 51.946,1.003 52.537,1.594 ; v1(49.235,2.153) 49.261,2.153 49.82,1.594 52.537,1.594 ; R14.CW@51.137,4.929 52.537,4.929 ; R14.W 53.687,3.779 52.537,4.929 ; 52.537,1.594 52.537,4.929
  Bottom Layer w0.254: v1(1.56,9.011) 1.56,17.139 2.677,18.257 3.693,18.257 4.049,17.901 4.049,12.821 4.336,12.534 P3.7 ; R15.2 47.954,2.257 48.057,2.153 v1(49.235,2.153)
NetP3_8: P3.8 R9.CW R9.W R11.2 | length 66.3
  Top Layer w0.254: v1(43.203,6.484) 43.673,6.014 43.673,4.929 R9.CW 46.529,4.929 R9.W 46.645,2.744 v1(46.645,1.975)
  Bottom Layer w0.254: P3.8 8.482,11.551 9.256,11.551 10.424,10.383 10.424,0.959 15.885,0.959 15.936,0.909 36.281,0.909 38.999,3.626 42.479,3.626 44.587,1.518 46.187,1.518 v1(46.645,1.975) ; v1(43.203,6.484) 43.673,6.954 43.673,7.313 44.257,7.897 45.813,7.897 46.552,7.158 46.552,6.842 47.481,5.912 R11.2
NetP3_9: P3.9 TB1.2 | length 89.7
  Top Layer w1: P3.9 1.89,14.047 1.89,21.119 9.656,28.886 73.143,28.886 74.094,27.934 TB1.2
NetR2_1: R2.1 SB6.1 U1.31 | length 10.8
  Bottom Layer w0.254: SB6.1 65.314,17.168 65.314,15.615 65.847,15.082 67.222,15.082 68.236,16.096 ; U1.31 69.783,14.55 68.236,16.096 ; 68.236,16.096 R2.1 68.263,16.123 68.236,16.096
NetR5_2: R5.2 SW1.1 SW1.2 U1.18 | length 34.6
  Top Layer w0.254: v1(81.239,8.503) 79.244,10.499 R5.2 79.244,23.383 81.451,25.591 83.398,25.591 ; SW1.1 83.398,25.591 ; SW1.2 83.398,25.591
  Bottom Layer w0.254: U1.18 76.635,7.697 77.023,7.309 80.046,7.309 v1(81.239,8.503)
NetR8_CCW: R8.CCW R12.1 | length 29.2
  Top Layer w0.254: R8.CCW 35.095,2.629 34.808,2.915 34.808,6.014 36.39,7.596 38.161,7.596 39.678,9.113 39.678,10.884 41.307,12.513 45.598,12.513 49.812,16.726 v1(49.812,19.072)
  Bottom Layer w0.254: R12.1 49.167,19.716 v1(49.812,19.072)
NetR9_CCW: R9.CCW R13.1 | length 41.4
  Top Layer w0.254: R9.CCW 42.073,2.629 41.038,1.594 34.605,1.594 33.995,2.204 33.995,6.064 42.963,15.031 46.238,15.031 48.405,17.198 48.405,18.417 v1(48.626,18.638)
  Bottom Layer w0.254: v1(48.626,18.638) 48.169,19.095 48.169,23.54 48.575,23.946 49.269,23.946 R13.1
NetR14_CCW: R14.CCW R16.1 | length 38
  Top Layer w0.254: R14.CCW@51.137,2.629 50.277,2.629 49.743,3.162 49.743,5.963 53.528,5.963 54.315,5.176 55.974,5.176 56.253,5.455 56.253,15.481 v1(54.773,16.961)
  Bottom Layer w0.254: R16.1 49.218,27.528 51.598,27.528 54.773,24.353 v1(54.773,16.961)
NetSB3_1: SB3.1 U1.16 | length 4.9
  Bottom Layer w0.254: U1.16 79.708,9.75 80.638,10.68 SB3.1
NetSB4_1: SB4.1 U1.32 | length 10
  Bottom Layer w0.254: SB4.1 67.565,21.508 67.921,21.152 70.902,21.152 70.902,17.444 70.521,17.063 70.521,15.35 U1.32
NetU1_7: U1.7 U3.1 U3.2 | length 32.1
  Top Layer w0.254: v1(59.878,22.194) 59.878,23.584 62.552,26.258 69.003,26.258 69.454,25.807 v1(69.454,24.361)
  Bottom Layer w0.254: U3.2 U3.1 56.841,23.007 57.653,22.194 v1(59.878,22.194) ; v1(69.454,24.361) 73.467,24.361 73.787,24.041 73.787,23.296 76.464,20.619 76.464,17.495 76.635,17.324 U1.7
NetU1_9: U1.9 U4.6 U4.7 | length 40.8
  Top Layer w0.254: v1(61.681,5.76) 60.03,7.411 60.03,14.498 61.326,15.793 64.393,15.793 64.893,15.293 67.338,15.293 68.6,16.555 71.562,16.555 76.464,21.457 77.125,21.457 78.395,20.187 78.395,16.035 v1(77.709,15.35)
  Bottom Layer w0.254: U4.7 U4.6 61.921,5.999 v1(61.681,5.76) ; v1(77.709,15.35) U1.9
NetU1_10: U1.10 U3.6 U3.7 | length 59.2
  Top Layer w0.254: v1(83.221,16.53) 83.729,16.53 84.541,17.342 84.541,26.283 v1(84.922,26.664)
  Bottom Layer w0.254: U3.7 U3.6 59.381,20.187 58.64,20.928 55.86,20.928 55.585,21.203 55.585,25.623 59.929,25.623 60.437,25.115 61.969,25.115 65.606,28.752 82.834,28.752 v1(84.922,26.664) ; U1.10 81.24,14.55 v1(83.221,16.53)
NetU1_14: U1.14 U2.5 | length 16.8
  Top Layer w0.254: U2.5 66.2,14.277 69.647,14.277 70.858,15.488 72.24,15.488 73.137,14.591 v1(73.137,14.093)
  Bottom Layer w0.254: v1(73.137,14.093) 75.88,11.35 U1.14
NetU1_15: U1.15 U2.6 | length 19.5
  Top Layer w0.254: U2.6 67.284,10.696 66.33,9.741 66.33,7.97 66.906,7.394 67.819,7.394 71.265,10.84 v1(71.892,10.84)
  Bottom Layer w0.254: v1(71.892,10.84) 71.932,10.88 74.472,10.88 74.803,10.55 U1.15
NetU1_26: U1.26 U2.4 | length 13.4
  Top Layer w0.254: U2.4 64.744,8.837 66.703,6.878 68.565,6.878 v1(69.53,7.843)
  Bottom Layer w0.254: v1(69.53,7.843) 69.403,7.97 69.403,10.296 69.657,10.55 U1.26
NetU1_27: U1.27 U2.1 | length 16.3
  Top Layer w0.254: v1(60.934,10.256) U2.1
  Bottom Layer w0.254: v1(60.934,10.256) 63.561,10.256 64.145,10.84 64.399,13.583 68.158,13.583 68.666,13.075 68.666,11.805 69.122,11.35 U1.27
NetU1_28: U1.28 U2.2 | length 11.2
  Top Layer w0.254: U2.2 62.204,13.75 v1(63.028,14.574)
  Bottom Layer w0.254: v1(63.028,14.574) 68.217,14.574 69.174,13.616 69.174,12.567 69.592,12.15 U1.28
NetU1_29: U1.29 U2.3 | length 20.5
  Top Layer w0.254: U2.3 63.474,13.685 64.89,14.785 67.684,14.785 68.896,15.996 73.01,15.996 74.026,14.98 74.026,13.583 73.467,13.024 72.476,13.024 71.74,13.761 v1(71.74,14.574)
  Bottom Layer w0.254: U1.29 71.181,12.95 71.74,13.508 v1(71.74,14.574)
PF0: SB1.2 U1.2 | length 3.1
  Bottom Layer w0.254: U1.2 72.635,17.672 73.678,18.714 SB1.2
PF1: SB2.2 U1.3 | length 4.2
  Bottom Layer w0.254: U1.3 73.435,17.743 74.082,18.39 75.288,18.39 75.562,18.663 SB2.2
VDD: C2.1 C3.1 C15.1 C16.2 C19.1 DA1.A P1.4 P3.3 R1.1 R2.2 R5.1 R17.2 SB5.2 U1.1 U1.17 U5.4 | length 268.5
  Top Layer w0.254: P3.3 5.942,18.423 6.411,18.892 8.826,18.892 9.613,19.679 9.613,22.551 14.05,26.988 23.612,26.988 24.724,25.876 C15.1 25.524,24.631 25.588,24.567 v1(27.305,26.283) ; R17.2 28.894,4.672 36.466,12.244 ; v1(40.168,15.945) 36.466,12.244 ; P1.4 67.523,3.774 ; v1(69.911,18.825) 69.698,18.612 57.465,18.612 57.211,18.358 57.211,5.892 ; v1(77.353,9.646) 77.353,2.763 75.829,1.239 ; v1(78.666,2.882) 77.023,1.239 75.829,1.239 ; v1(80.844,22.703) R5.1 80.844,14.907 v1(82.179,13.572) ; 36.466,12.244 39.277,12.244 42.572,15.539 45.482,15.539 DA1.A 47.524,19.704 48.05,20.23 54.374,20.23 56.906,17.698 56.906,6.197 57.211,5.892 ; 57.211,5.892 57.787,5.316 57.787,3.554 57.211,2.977 57.211,2.026 57.922,1.315 65.064,1.315 67.523,3.774 ; 67.523,3.774 67.523,1.239 75.829,1.239
  Bottom Layer w0.254: v1(27.305,26.283) 27.62,26.283 29.337,24.567 U5.4 35.621,24.567 36.33,23.857 C16.2 36.33,18.772 36.337,18.765 C19.1 36.337,17.139 37.531,15.945 v1(40.168,15.945) ; R2.2 v1(69.911,18.825) ; U1.1 71.835,17.616 72.756,18.536 72.756,20.362 73.241,20.848 73.241,23.853 70.834,23.853 70.114,23.134 67.549,23.134 66.431,24.251 66.431,25.343 68.133,27.045 71.356,27.045 72.951,25.45 74.737,25.45 75.245,25.958 75.245,27.736 75.753,28.244 80.879,28.244 83.424,25.699 87.859,25.699 89.306,24.251 89.306,17.487 87.945,16.125 R1.1 87.481,20.485 87.183,20.783 SB5.2 86.243,20.783 83.953,23.073 81.214,23.073 v1(80.844,22.703) ; v1(77.353,9.646) 77.435,9.564 77.435,9.029 ; U1.17 77.435,9.029 ; v1(78.666,2.882) C2.1 ; C3.1 82.128,7.225 82.128,7.995 ; v1(82.179,13.572) 82.179,12.059 82.713,11.526 84.135,11.526 84.389,11.272 84.389,9.184 84.288,9.083 83.217,9.083 82.128,7.995 ; 77.435,9.029 79.995,9.029 80.35,9.384 81.849,9.384 82.128,9.105 82.128,7.995
pads on no net: U1.6 U1.8 U1.11 U1.12 U1.13 U1.21 U1.22 U1.25 U1.30 U2.11 U2.12 U4.1
copper on no net: | length 0
  Top Layer w0.254: 47.524,12.456 47.524,12.481 47.524,12.456

## Keep-outs
Keep-Out Layer:
  lines w0.254: 0.33,0.381 0.33,29.769 89.814,29.769 89.814,0.381 0.33,0.381

## Silkscreen, mask and mechanical layers (free items; w line width, h text height)
Top Overlay:
  lines w0.15: 66.116,9.195 76.149,9.195 ; 69.672,7.772 69.672,10.617 ; 73.127,7.747 73.127,10.693 ; 76.149,7.747 66.167,7.747 66.116,7.798 66.116,10.719 76.2,10.719 76.2,7.772
  lines w0.254: 79.756,20.879 80.239,20.879 81.813,22.454 82.093,22.454
  text "000 Vodiy Nefty Gazovik Energiya /            Made in UZ" at 46.422,24.482 h0.7
  text "POWER SWITCH" at 72.437,22.609 h0.5
  text "BUZER" at 28.633,21.62 h0.5
  text "GAS SENSOR" at 47.291,20.705 h0.5
  text "CALIBRATION" at 74.175,20.57 h0.5
  text "GND" at 73.936,9.554 h0.5
  text "+3.3V" at 66.56,9.516 h0.5
  text "+5V" at 70.421,9.516 h0.5
  text "SWDIO" at 66.672,8.131 h0.5
  text "SWCLK" at 70.05,8.106 h0.5
  text "NRST" at 73.809,8.106 h0.5
  text "POWER" at 30.781,6.956 h0.5
  text "BOARD" at 36.954,6.956 h0.5
  text "BACK" at 44.599,6.956 h0.5
  text "FORWARD" at 51.305,6.854 h0.5
  text "RX MCU" at 61.302,4.238 h0.5 r90
  text "GND" at 58.838,4.147 h0.5 r90
  text "TX MCU" at 63.991,4.137 h0.5 r90
Board:
  lines w0.254: 0.042,0.12 0.042,30.021 90.085,30.021 90.085,0.12 ; 0.103,0.074 90.103,0.074

## Text inside footprints (layer, text, board x,y; h text height)
DA1: Top Overlay "HEATER" at 48.32,14.569 h0.5 r44.25; Top Overlay "A" at 46.674,16.231 h0.5; Top Overlay "H1" at 52.724,16.081 h0.5; Top Overlay "B" at 52.754,13.311 h0.5; Top Overlay "H2" at 46.524,13.281 h0.5
P1: Top Overlay "6" at 75.781,4.412 h1.27; Top Overlay "3" at 75.781,1.872 h1.27; Top Overlay "1" at 66.637,1.872 h1.27; Top Overlay "4" at 66.129,4.412 h1.27
P3: Top Overlay "2" at 7.974,22.694 h1.27 r270; Top Overlay "1" at 5.434,22.186 h1.27 r270; Top Overlay "9" at 5.434,8.47 h1.27 r270; Top Overlay "10" at 7.974,8.47 h1.27 r270